# Altium PCB BOARD 2.pcbdoc
Units mil, origin at the board's own origin, x right, y up, seen from the top; angles counter-clockwise.
Board outline 6425 x 5035 mil, 2 copper layers (TopLayer, BottomLayer); 106 components, 189 nets, 1082 pads, 0 vias.
Unrouted connection lines stored in the file: 500.
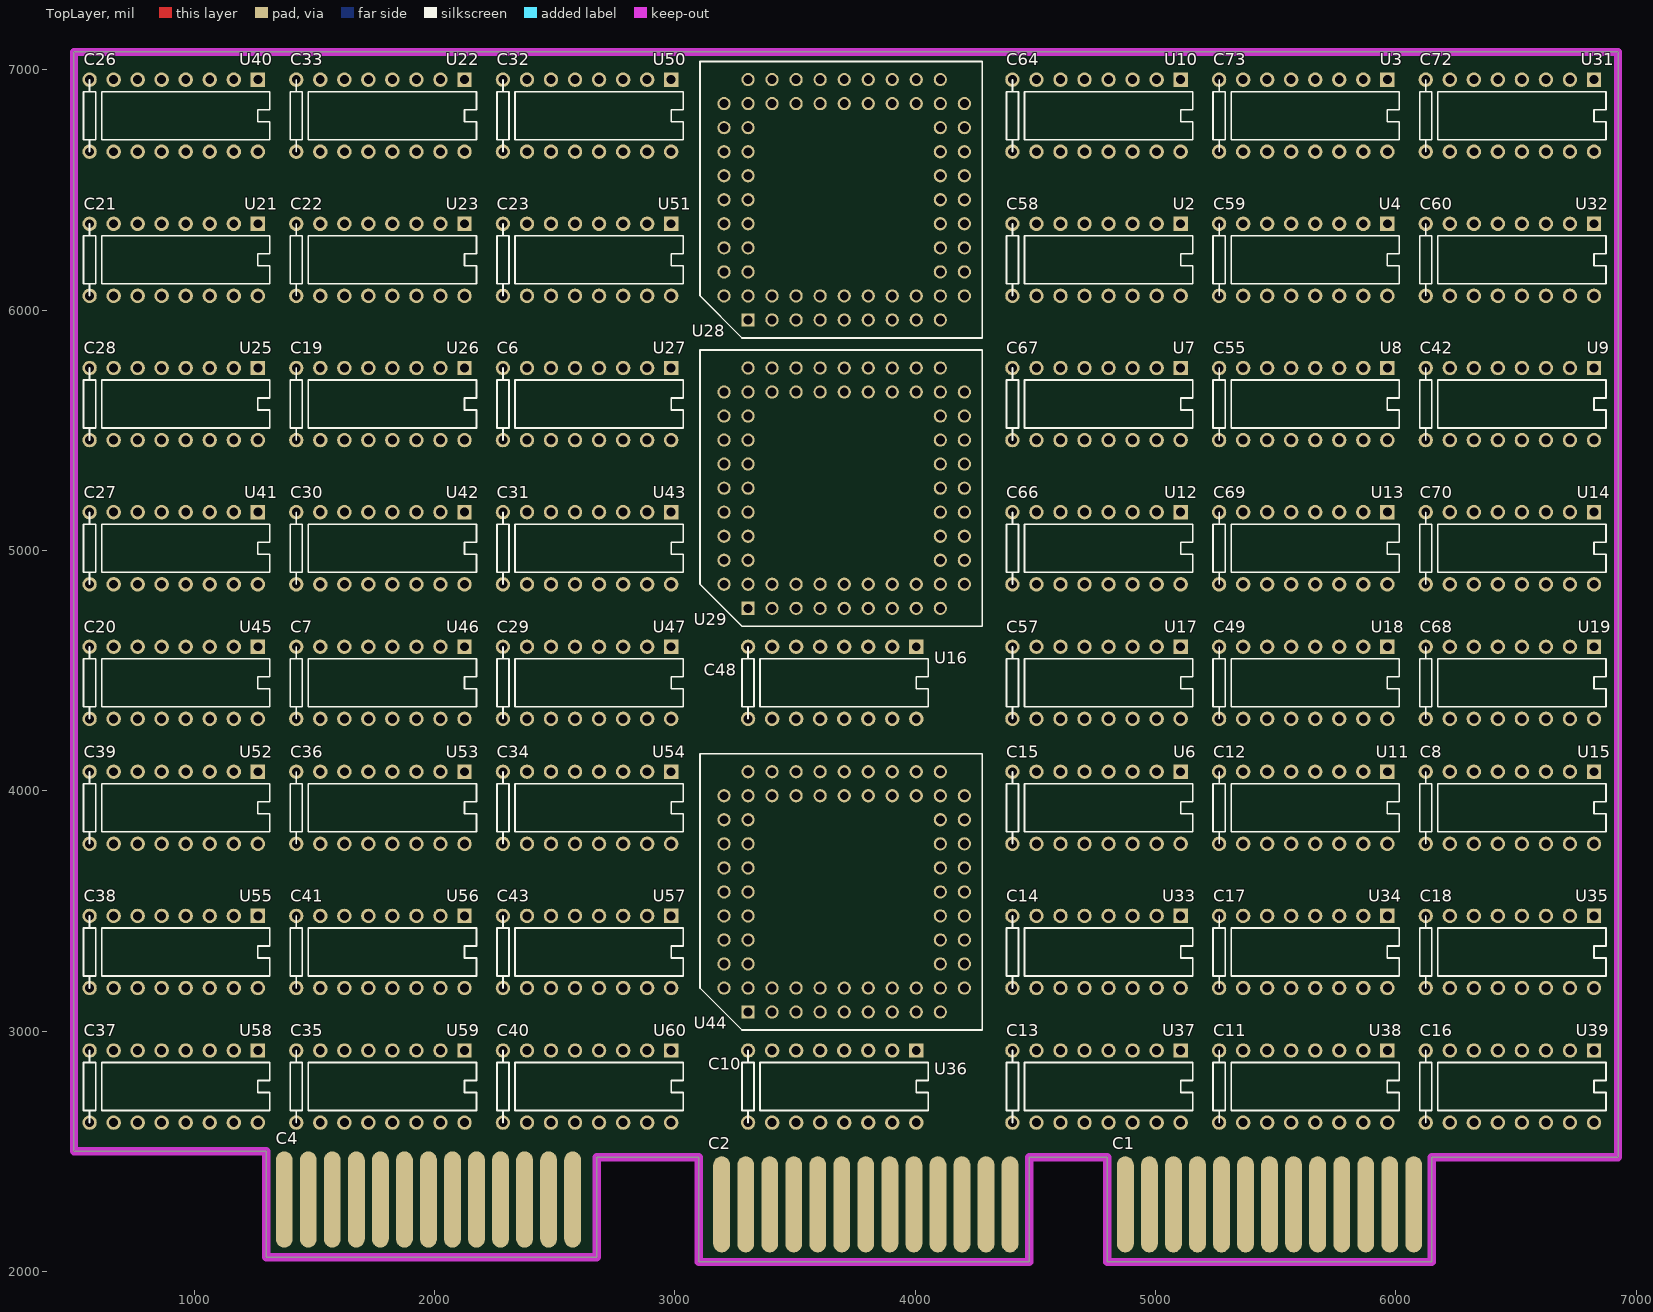
[diagram p0: TopLayer view]
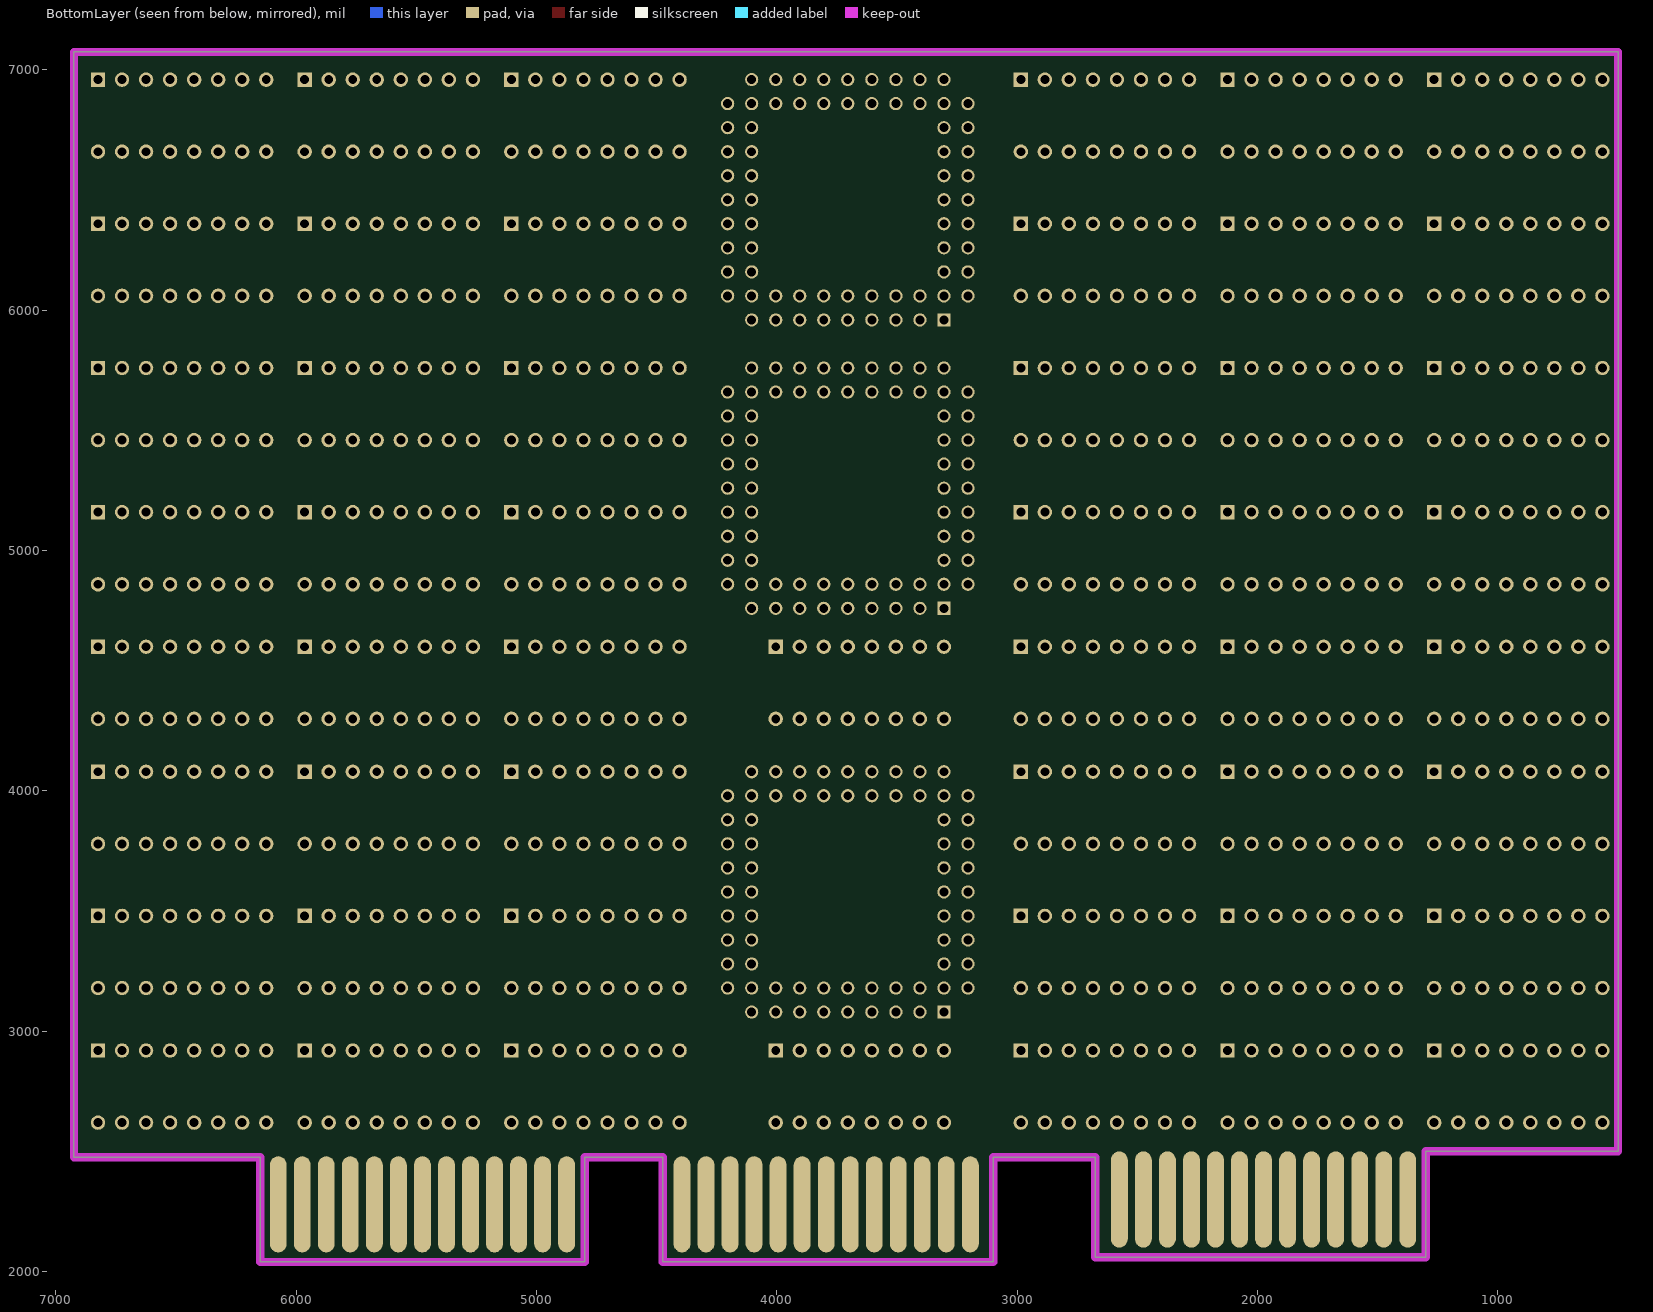
[diagram p1: BottomLayer view, seen from below]

## Layer stack, top to bottom
TopLayer: signal copper 1.4
Dielectric: core 12.6, FR-4, Dk 4.8
BottomLayer: signal copper 1.4

## Board outline
500,2500 500,7075 6925,7075 6925,2475 6150,2475 6150,2040 4800,2040 4800,2475 4475,2475 4475,2040 3100,2040 3100,2475 2675,2475 2675,2060 1300,2060 1300,2500 500,2500

## Design rules (kind name [scope] priority, off if disabled: settings)
Clearance [All] p1: gap=13
FabricationTestPointUsage TestPointUsage [All] p1: valid=0 allowmultiple=FALSE
FabricationTestpoint Testpoint [All] p1: side=3 testpointundercomponent=TRUE minsize=40 maxsize=100 preferedsize=60 minholesize=20 maxholesize=40 preferedholesize=32 testpointgrid=1 allowsidetop=TRUE allowsidebottom=TRUE usegrid=TRUE gridtolerance=0.01
FanoutControl Fanout_BGA [IsBGA] p1: bgadir=Out bgaviamode=Closest fanoutstyle=Auto fanoutdirection=Alternating viagrid=1 // Fanout_BGA (Default Rule)
FanoutControl Fanout_LCC [IsLCC] p2: bgadir=Out bgaviamode=Closest fanoutstyle=Auto fanoutdirection=Alternating viagrid=1 // Fanout_LCC (Default Rule)
FanoutControl Fanout_SOIC [IsSOIC] p3: bgadir=Out bgaviamode=Closest fanoutstyle=Auto fanoutdirection=Alternating viagrid=1 // Fanout_SOIC (Default Rule)
FanoutControl Fanout_Small [(CompPinCount < 5)] p4: bgadir=Out bgaviamode=Closest fanoutstyle=Auto fanoutdirection=OutThenIn viagrid=1 // Fanout_Small (Default Rule)
FanoutControl Fanout_Default [All] p5: bgadir=Out bgaviamode=Closest fanoutstyle=Auto fanoutdirection=Alternating viagrid=1 // Fanout_Default (Default Rule)
PlaneClearance [All] p1: clearance=10
PolygonConnect [All] p1: connectstyle=Relief reliefconductorwidth=10 reliefentries=4 polygonreliefangle="90 Angle"
RoutingPriority RoutingPriority_Power [InNetClass('Power')] p1: routingpriority=50
RoutingPriority [All] p2: routingpriority=0
RoutingVias [All] p1: holewidth=20 width=40 viastyle="Through Hole" minholewidth=20 minwidth=40 maxholewidth=20 maxwidth=40
SilkscreenOverComponentPads [All] p1: minsilkscreentomaskgap=10
SolderMaskExpansion [All] p1: expansion=2
Width Width_Power [InNetClass('Power')] p1: maxlimit=50 minlimit=50 preferedwidth=50
Width Width_All [All] p2: maxlimit=10 minlimit=10 preferedwidth=10
18 further rules are at their usual default settings.

## Classes and differential pairs
net class Power: GND VCC

## Components (designator, comment, footprint, x,y, rotation, side; value= is the part's Value field where it differs from the comment)
C1 "CON\26P\ED" CON\26P\ED 4875,2280 r180 top
C2 "CON\26P\ED" CON\26P\ED 3195,2280 r180 top
C4 "CON\26P\ED" CON\26P\ED 1375,2300 r180 top
C6 "CAP1" CAP1 2285,5460 r0 top
C7 "CAP1" CAP1 1425,4300 r0 top
C8 "CAP1" CAP1 6125,3780 r0 top
C10 "CAP1" CAP1 3305,2620 r0 top
C11 "CAP1" CAP1 5265,2620 r0 top
C12 "CAP1" CAP1 5265,3780 r0 top
C13 "CAP1" CAP1 4405,2620 r0 top
C14 "CAP1" CAP1 4405,3180 r0 top
C15 "CAP1" CAP1 4405,3780 r0 top
C16 "CAP1" CAP1 6125,2620 r0 top
C17 "CAP1" CAP1 5265,3180 r0 top
C18 "CAP1" CAP1 6125,3180 r0 top
C19 "CAP1" CAP1 1425,5460 r0 top
C20 "CAP1" CAP1 565,4300 r0 top
C21 "CAP1" CAP1 565,6060 r0 top
C22 "CAP1" CAP1 1425,6060 r0 top
C23 "CAP1" CAP1 2285,6060 r0 top
C26 "CAP1" CAP1 565,6660 r0 top
C27 "CAP1" CAP1 565,4860 r0 top
C28 "CAP1" CAP1 565,5460 r0 top
C29 "CAP1" CAP1 2285,4300 r0 top
C30 "CAP1" CAP1 1425,4860 r0 top
C31 "CAP1" CAP1 2285,4860 r0 top
C32 "CAP1" CAP1 2285,6660 r0 top
C33 "CAP1" CAP1 1425,6660 r0 top
C34 "CAP1" CAP1 2285,3780 r0 top
C35 "CAP1" CAP1 1425,2620 r0 top
C36 "CAP1" CAP1 1425,3780 r0 top
C37 "CAP1" CAP1 565,2620 r0 top
C38 "CAP1" CAP1 565,3180 r0 top
C39 "CAP1" CAP1 565,3780 r0 top
C40 "CAP1" CAP1 2285,2620 r0 top
C41 "CAP1" CAP1 1425,3180 r0 top
C42 "CAP1" CAP1 6125,5460 r0 top
C43 "CAP1" CAP1 2285,3180 r0 top
C48 "CAP1" CAP1 3305,4300 r0 top
C49 "CAP1" CAP1 5265,4300 r0 top
C55 "CAP1" CAP1 5265,5460 r0 top
C57 "CAP1" CAP1 4405,4300 r0 top
C58 "CAP1" CAP1 4405,6060 r0 top
C59 "CAP1" CAP1 5265,6060 r0 top
C60 "CAP1" CAP1 6125,6060 r0 top
C64 "CAP1" CAP1 4405,6660 r0 top
C66 "CAP1" CAP1 4405,4860 r0 top
C67 "CAP1" CAP1 4405,5460 r0 top
C68 "CAP1" CAP1 6125,4300 r0 top
C69 "CAP1" CAP1 5265,4860 r0 top
C70 "CAP1" CAP1 6125,4860 r0 top
C72 "CAP1" CAP1 6125,6660 r0 top
C73 "CAP1" CAP1 5265,6660 r0 top
U2 "7404" DIP14 5105,6360 r0 top
U3 "7404" DIP14 5965,6960 r0 top
U4 "7404" DIP14 5965,6360 r0 top
U6 "7404" DIP14 5105,4080 r0 top
U7 "7404" DIP14 5105,5760 r0 top
U8 "7404" DIP14 5965,5760 r0 top
U9 "7404" DIP14 6825,5760 r0 top
U10 "7404" DIP14 5105,6960 r0 top
U11 "7404" DIP14 5965,4080 r0 top
U12 "7404" DIP14 5105,5160 r0 top
U13 "7404" DIP14 5965,5160 r0 top
U14 "7404" DIP14 6825,5160 r0 top
U15 "7404" DIP14 6825,4080 r0 top
U16 "7404" DIP14 4005,4600 r0 top
U17 "7404" DIP14 5105,4600 r0 top
U18 "7404" DIP14 5965,4600 r0 top
U19 "7404" DIP14 6825,4600 r0 top
U21 "7404" DIP14 1265,6360 r0 top
U22 "7404" DIP14 2125,6960 r0 top
U23 "7404" DIP14 2125,6360 r0 top
U25 "7404" DIP14 1265,5760 r0 top
U26 "7404" DIP14 2125,5760 r0 top
U27 "7404" DIP14 2985,5760 r0 top
U28 "8397" ? 3305,5960 r0 top
U29 "8397" ? 3305,4760 r0 top
U31 "7404" DIP14 6825,6960 r0 top
U32 "7404" DIP14 6825,6360 r0 top
U33 "7404" DIP14 5105,3480 r0 top
U34 "7404" DIP14 5965,3480 r0 top
U35 "7404" DIP14 6825,3480 r0 top
U36 "7404" DIP14 4005,2920 r0 top
U37 "7404" DIP14 5105,2920 r0 top
U38 "7404" DIP14 5965,2920 r0 top
U39 "7404" DIP14 6825,2920 r0 top
U40 "7404" DIP14 1265,6960 r0 top
U41 "7404" DIP14 1265,5160 r0 top
U42 "7404" DIP14 2125,5160 r0 top
U43 "7404" DIP14 2985,5160 r0 top
U44 "8397" ? 3305,3080 r0 top
U45 "7404" DIP14 1265,4600 r0 top
U46 "7404" DIP14 2125,4600 r0 top
U47 "7404" DIP14 2985,4600 r0 top
U50 "7404" DIP14 2985,6960 r0 top
U51 "7404" DIP14 2985,6360 r0 top
U52 "7404" DIP14 1265,4080 r0 top
U53 "7404" DIP14 2125,4080 r0 top
U54 "7404" DIP14 2985,4080 r0 top
U55 "7404" DIP14 1265,3480 r0 top
U56 "7404" DIP14 2125,3480 r0 top
U57 "7404" DIP14 2985,3480 r0 top
U58 "7404" DIP14 1265,2920 r0 top
U59 "7404" DIP14 2125,2920 r0 top
U60 "7404" DIP14 2985,2920 r0 top

## Footprints (in the part's own frame and the unit in brackets; to place one, negate y for a bottom-side part, rotate by r counter-clockwise, add the part's x,y. Pads: shape width x height; smd on the part's side, far side on the other; paste and mask are expansions set on the pad)
CAP1 [mil]
  round 60 hole 37: 1(0,0) 2(0,300)
  silkscreen extent -25,0 25,300
CON\26P\ED [mil]
  oval 70x400 smd: 1(0,0) 3(-100,0) 5(-200,0) 7(-300,0) 9(-400,0) 11(-500,0) 13(-600,0) 15(-700,0) 17(-800,0) 19(-900,0) 21(-1000,0) 23(-1100,0) 25(-1200,0)
  oval 70x400 smd far side: 2(0,0) 4(-100,0) 6(-200,0) 8(-300,0) 10(-400,0) 12(-500,0) 14(-600,0) 16(-700,0) 18(-800,0) 20(-900,0) 22(-1000,0) 24(-1100,0) 26(-1200,0)
DIP14 [mil]
  rect 60x60 hole 37: 1(0,0)
  round 60 hole 37: 2(-100,0) 3(-200,0) 4(-300,0) 5(-400,0) 6(-500,0) 7(-600,0) 8(-600,-300) 9(-500,-300) 10(-400,-300) 11(-300,-300) 12(-200,-300) 13(-100,-300) 14(0,-300)
  silkscreen extent -650,-250 50,-50
? [mil]
  rect 55x55 hole 37: 1(0,0)
  round 55 hole 37: 2(0,100) 3(100,0) 4(100,100) 5(200,0) 6(200,100) 7(300,0) 8(300,100) 9(400,0) 10(400,100) 11(500,0) 12(500,100) 13(600,0) 14(600,100) 15(700,0) 16(700,100) 17(800,0) 18(900,100) 19(800,100) 20(900,200) 21(800,200) 22(900,300) 23(800,300) 24(900,400) 25(800,400) 26(900,500) 27(800,500) 28(900,600) 29(800,600) 30(900,700) 31(800,700) 32(900,800) 33(800,800) 34(900,900) 35(800,1000) 36(800,900) 37(700,1000) 38(700,900) 39(600,1000) 40(600,900) 41(500,1000) 42(500,900) 43(400,1000) 44(400,900) 45(300,1000) 46(300,900) 47(200,1000) 48(200,900) 49(100,1000) 50(100,900) 51(0,1000) 52(-100,900) 53(0,900) 54(-100,800) 55(0,800) 56(-100,700) 57(0,700) 58(-100,600) 59(0,600) 60(-100,500) 61(0,500) 62(-100,400) 63(0,400) 64(-100,300) 65(0,300) 66(-100,200) 67(0,200) 68(-100,100)
  silkscreen extent -200,-75 975,1075

## Nets (pads, with @x,y where several pads share a name; then routed paths per layer and width w, separated by ;. In a path a pad name is that pad's centre, name@x,y a point inside that pad or via, vN(x,y) a via of type N, cw(c..) or ccw(c..) an arc to the next point about the centre after c; other vN are vias at no path point)
$$$8: U23.11 U28.52
$$$63: U55.12 U56.6
$$$144: U22.3 U27.3 U44.48
$$$183: U4.4 U8.3
$$$210: U3.5 U28.22
$$$274: U28.30 U28.67
$$$675: C2.15 U32.10
$$$691: U26.8 U28.7 U47.9 U50.1
$$$859: U44.30 U54.11
$$$1023: U28.11 U29.35
$$$1061: U8.2 U32.6
$$$1139: U2.5 U9.5
$$$1166: U52.1 U55.8 U59.6
$$$1338: U28.20 U28.54
$$$1745: U38.10 U44.19 U44.27
$$$1779: U12.2 U14.2
$$$1934: U28.19 U31.9
$$$1952: U53.13 U55.1
$$$2193: U28.9 U29.43
$$$2370: U52.2 U58.1
$$$2381: U3.9 U28.65
$$$2413: U28.16 U28.59
$$$2423: U29.41 U31.13
$$$2613: C1.15 U12.13
$$$2920: U11.8 U44.38
$$$3035: U4.9 U4.10 U10.10 U14.13 U17.12
$$$3036: C2.23 U18.6
$$$3260: U21.3 U50.3 U54.1
$$$3322: U28.6 U28.39 U50.9
$$$3431: C2.19 U28.63 U29.12
$$$3444: U44.49 U47.3 U51.2
$$$3502: U18.5 U44.37
$$$3567: U52.6 U55.6
$$$3685: U17.9 U29.20 U37.3
$$$3867: U29.32 U32.3
$$$3914: C2.13 U28.26
$$$3928: U28.29 U28.58 U50.6
$$$3971: U28.42 U51.6
$$$4009: U16.2 U29.13
$$$4093: U3.6 U28.61
$$$4176: U6.4 U15.4 U15.12 U19.2
$$$4277: U12.9 U13.12 U14.4
$$$4295: U6.3 U16.3 U29.5
$$$4393: U28.10 U31.10 U51.9
$$$4428: U28.27 U29.4
$$$4500: U7.9 U14.10 U29.57
$$$4620: U6.6 U44.55 U60.12
$$$4672: C1.1 U19.4
$$$4682: U29.37 U51.10
$$$4769: C4.9 U53.2
$$$4820: U8.1 U14.1
$$$4897: U4.2 U10.11 U14.3 U29.38
$$$4960: U13.4 U19.1
$$$4961: U29.1 U29.39
$$$5040: U15.6 U29.55
$$$5164: U32.9 U44.3
$$$5310: U12.6 U29.33 U29.59
$$$5404: U9.4 U19.3 U32.2
$$$5494: U15.2 U37.2
$$$5496: C1.2 U14.6
$$$5591: U12.3 U18.2 U28.25
$$$5741: U7.1 U29.67
$$$5835: U37.11 U44.11 U57.3
$$$5943: C2.17 U9.9 U10.13 U19.5
$$$5975: U29.16 U29.45
$$$6004: U27.1 U29.6 U51.5
$$$6007: U2.12 U3.13 U13.6 U32.11
$$$6327: U29.22 U29.61
$$$6506: U23.12 U29.50 U46.5
$$$6549: C4.3 U46.8 U54.10
$$$6602: U16.4 U29.9 U29.58
$$$6889: U17.3 U39.4
$$$6926: U43.3 U44.40
$$$6991: U17.6 U29.63
$$$7007: U16.10 U19.12 U43.11 U47.12
$$$7022: U7.10 U14.5 U28.33 U57.11
$$$7226: U33.5 U44.46
$$$7323: C2.9 U13.5
$$$7355: U17.2 U44.44
$$$7715: U10.1 U60.3
$$$7778: U52.3 U52.8 U55.11 U58.8
$$$7877: U17.1 U29.7
$$$7942: U2.3 U4.5 U32.4
$$$8047: U2.4 U4.1
$$$8066: U8.4 U19.11
$$$8332: U29.24 U44.53
$$$8531: U28.18 U29.2
$$$8623: U2.10 U28.46
$$$8661: U3.11 U31.1
$$$8669: C4.15 U54.6 U59.12
$$$8706: U52.11 U53.10 U56.2
$$$8739: U7.13 U10.9 U16.12
$$$8914: U6.8 U29.10
$$$9132: U29.65 U36.8 U44.2 U44.64
$$$9320: U9.1 U13.1 U32.1
$$$9321: U45.10 U55.13 U56.10
$$$9542: U11.3 U19.6 U37.10
$$$9687: U21.10 U28.62 U29.46 U50.12
$$$9865: U18.8 U44.50
$$$9883: U28.12 U28.50
$$$AADHE: U46.1 U54.2 U58.2
$$$AGECH: U33.2 U35.2
$$$AHHHI: U23.2 U40.11 U51.8
$$$AHJFD: U21.12 U22.13 U28.8 U42.6
$$$AIHDE: U29.49 U41.3 U46.2
$$$AJGAA: U11.1 U35.1
$$$AJIBG: U33.10 U36.1
$$$BCBFJ: U26.9 U41.9 U42.12 U43.4
$$$BCJFD: U53.9 U55.9 U56.12 U57.4
$$$BDDHF: U34.10 U36.10 U39.12
$$$BDEIJ: U25.10 U43.5
$$$BDHEB: U55.2 U57.2
$$$BEBDJ: U23.13 U26.6 U42.11 U45.13
$$$BGACF: U26.4 U47.11
$$$BGGBC: U34.4 U39.1
$$$BHEJI: U34.13 U44.25
$$$BIABB: U35.13 U37.12
$$$CAHGG: U11.6 U34.11 U37.13
$$$CBCHE: U53.1 U57.1
$$$CGIGD: U23.3 U27.13 U40.6
$$$CIDID: U55.3 U59.2
$$$DAIED: U6.10 U35.5
$$$DCCJI: U25.9 U43.10
$$$DFGAI: U42.4 U47.1
$$$DJABJ: U52.9 U57.10 U59.5
$$$EABFC: U6.12 U34.3 U37.5 U38.13
$$$EAGCC: U6.13 U36.12
$$$EDCCF: U21.6 U25.2
$$$EEFFB: U21.5 U27.5
$$$EJDID: U45.9 U58.3
$$$FBEJC: U53.4 U60.11
$$$FCEDE: U44.1 U44.39
$$$FDEBH: U37.9 U44.20
$$$FEBDG: U36.9 U44.29
$$$FEIEE: U21.1 U26.1
$$$FFCEC: U57.13 U58.12
$$$FGBCC: U37.6 U44.63
$$$FGBCD: U33.6 U44.33
$$$FIBII: U53.6 U56.11 U58.13
$$$FJAFH: U21.4 U23.1
$$$FJIDJ: U36.4 U44.9 U44.58
$$$GAGIB: U52.12 U56.3 U58.5 U59.13
$$$GEDBF: U52.10 U57.5
$$$GEECJ: C4.19 U44.12
$$$GGBFA: U11.5 U35.9
$$$GGEHJ: U21.11 U26.5 U40.5
$$$GHCAI: U56.4 U60.1
$$$HAFJG: U15.9 U39.5
$$$HBAEF: U36.2 U44.13
$$$HBEHJ: U44.16 U44.45
$$$HBFJD: U41.2 U43.2
$$$HBJHI: U6.9 U35.10 U38.5 U44.57
$$$HECHG: C4.7 U39.9
$$$HJJIF: U45.3 U60.4
$$$ICCJI: U47.6 U58.10
$$$IDHGA: U53.5 U57.9
$$$IEHDA: U44.22 U44.61
$$$IFBFJ: U23.9 U40.3 U40.10 U43.13 U45.12
$$$IFGFD: U36.3 U44.5
$$$IHIFF: U11.4 U39.11
$$$JAAAJ: U25.13 U40.9
$$$JADED: U11.9 U33.9 U34.12 U35.4
$$$JBGJA: U22.10 U41.10 U51.4
$$$JGABC: U54.9 U60.5
$$$JHDFD: C4.23 U38.6
$$$JJFCI: U27.9 U40.13
CD: U27.11 U28.56
E: U29.60 U44.60
FR: U16.9 U28.17 U28.66 U29.29 U50.5
FW: U45.4 U47.13
GND: C2.1 C4.1 C6.1 C7.1 C8.1 C10.1 C11.1 C12.1 C13.1 C14.1 C15.1 C16.1 C17.1 C18.1 C19.1 C20.1 C21.1 C22.1 C23.1 C26.1 C27.1 C28.1 C29.1 C30.1 C31.1 C32.1 C33.1 C34.1 C35.1 C36.1 C37.1 C38.1 C39.1 C40.1 C41.1 C42.1 C43.1 C48.1 C49.1 C55.1 C57.1 C58.1 C59.1 C60.1 C64.1 C66.1 C67.1 C68.1 C69.1 C70.1 C72.1 C73.1 U2.14 U3.14 U4.14 U6.14 U7.14 U8.14 U9.14 U10.14 U11.14 U12.14 U13.14 U14.14 U15.14 U16.14 U17.14 U18.14 U19.14 U21.14 U22.14 U23.14 U25.14 U26.14 U27.14 U28.51 U29.51 U32.14 U33.14 U34.14 U35.14 U36.14 U37.14 U38.14 U39.14 U40.14 U41.14 U42.14 U43.14 U44.51 U45.14 U46.14 U47.14 U50.14 U51.14 U52.14 U53.14 U54.14 U55.14 U56.14 U57.14 U58.14 U59.14 U60.14
GT: U22.12 U40.2
GY: U21.9 U23.5 U27.6 U46.10 U47.2 U52.4 U54.4 U54.12
HY: U18.13 U33.4
IU: U6.5 U15.13 U44.67 U60.10
L: U29.52 U44.52
NH: U3.10 U12.10
OI: U2.13 U3.12 U7.12 U13.3 U28.28
P: U2.11 U8.5 U10.5 U14.9 U28.49 U31.12 U51.12
Q: U29.56 U44.56
SE: U22.2 U22.9 U27.4
UH: U13.11 U17.13 U27.12
VCC: C1.25 C6.2 C7.2 C8.2 C10.2 C11.2 C12.2 C13.2 C14.2 C15.2 C16.2 C17.2 C18.2 C19.2 C20.2 C21.2 C22.2 C23.2 C26.2 C27.2 C28.2 C29.2 C30.2 C31.2 C32.2 C33.2 C34.2 C35.2 C36.2 C37.2 C38.2 C39.2 C40.2 C41.2 C42.2 C43.2 C48.2 C49.2 C55.2 C57.2 C58.2 C59.2 C60.2 C64.2 C66.2 C67.2 C68.2 C69.2 C70.2 C72.2 C73.2 U2.7 U3.7 U4.7 U6.7 U7.7 U8.7 U9.7 U10.7 U11.7 U12.7 U13.7 U14.7 U15.7 U16.7 U17.7 U18.7 U19.7 U21.7 U22.7 U23.7 U25.7 U26.7 U27.7 U28.34 U29.34 U33.7 U34.7 U35.7 U36.7 U37.7 U38.7 U39.7 U40.7 U41.7 U42.7 U43.7 U44.34 U45.7 U46.7 U47.7 U50.7 U51.7 U52.7 U53.7 U54.7 U55.7 U56.7 U57.7 U58.7 U59.7 U60.7
VF: U23.4 U25.6 U26.3 U45.11
YG: U2.6 U7.2
YT: U2.1 U4.13 U8.6
YTY: U16.13 U58.4
YU: U21.13 U25.12 U42.3 U46.13 U55.4
Z: U29.62 U44.62
pads on no net: C1.3 C1.4 C1.5 C1.6 C1.7 C1.8 C1.9 C1.10 C1.11 C1.12 C1.13 C1.14 C1.16 C1.17 C1.18 C1.19 C1.20 C1.21 C1.22 C1.23 C1.24 C1.26 C2.2 C2.3 C2.4 C2.5 C2.6 C2.7 C2.8 C2.10 C2.11 C2.12 C2.14 C2.16 C2.18 C2.20 C2.21 C2.22 C2.24 C2.25 C2.26 C4.2 C4.4 C4.5 C4.6 C4.8 C4.10 C4.11 C4.12 C4.13 C4.14 C4.16 C4.17 C4.18 C4.20 C4.21 C4.22 C4.24 C4.25 C4.26 U2.2 U2.8 U2.9 U3.1 U3.2 U3.3 U3.4 U3.8 U4.3 U4.6 U4.8 U4.11 U4.12 U6.1 U6.2 U6.11 U7.3 U7.4 U7.5 U7.6 U7.8 U7.11 U8.8 U8.9 U8.10 U8.11 U8.12 U8.13 U9.2 U9.3 U9.6 U9.8 U9.10 U9.11 U9.12 U9.13 U10.2 U10.3 U10.4 U10.6 U10.8 U10.12 U11.2 U11.10 U11.11 U11.12 U11.13 U12.1 U12.4 U12.5 U12.8 U12.11 U12.12 U13.2 U13.8 U13.9 U13.10 U13.13 U14.8 U14.11 U14.12 U15.1 U15.3 U15.5 U15.8 U15.10 U15.11 U16.1 U16.5 U16.6 U16.8 U16.11 U17.4 U17.5 U17.8 U17.10 U17.11 U18.1 U18.3 U18.4 U18.9 U18.10 U18.11 U18.12 U19.8 U19.9 U19.10 U19.13 U21.2 U21.8 U22.1 U22.4 U22.5 U22.6 U22.8 U22.11 U23.6 U23.8 U23.10 U25.1 U25.3 U25.4 U25.5 U25.8 U25.11 U26.2 U26.10 U26.11 U26.12 U26.13 U27.2 U27.8 U27.10 U28.1 U28.2 U28.3 U28.4 U28.5 U28.13 U28.14 U28.15 U28.21 U28.23 U28.24 U28.31 U28.32 U28.35 U28.36 U28.37 U28.38 U28.40 U28.41 U28.43 U28.44 U28.45 U28.47 U28.48 U28.53 U28.55 U28.57 U28.60 U28.64 U28.68 U29.3 U29.8 U29.11 U29.14 U29.15 U29.17 U29.18 U29.19 U29.21 U29.23 U29.25 U29.26 U29.27 U29.28 U29.30 U29.31 U29.36 U29.40 U29.42 U29.44 U29.47 U29.48 U29.53 U29.54 U29.64 U29.66 U29.68 U31.2 U31.3 U31.4 U31.5 U31.6 U31.7 U31.8 U31.11 U31.14 U32.5 U32.7 U32.8 U32.12 U32.13 U33.1 U33.3 U33.8 U33.11 U33.12 U33.13 U34.1 U34.2 U34.5 U34.6 U34.8 U34.9 U35.3 U35.6 U35.8 U35.11 U35.12 U36.5 U36.6 U36.11 U36.13 U37.1 U37.4 U37.8 U38.1 U38.2 U38.3 U38.4 U38.8 U38.9 U38.11 U38.12 U39.2 U39.3 U39.6 U39.8 U39.10 U39.13 U40.1 U40.4 U40.8 U40.12 U41.1 U41.4 U41.5 U41.6 U41.8 U41.11 U41.12 U41.13 U42.1 U42.2 U42.5 U42.8 U42.9 U42.10 U42.13 U43.1 U43.6 U43.8 U43.9 U43.12 U44.4 U44.6 U44.7 U44.8 U44.10 U44.14 U44.15 U44.17 U44.18 U44.21 U44.23 U44.24 U44.26 U44.28 U44.31 U44.32 U44.35 U44.36 U44.41 U44.42 U44.43 U44.47 U44.54 U44.59 U44.65 U44.66 U44.68 U45.1 U45.2 U45.5 U45.6 U45.8 U46.3 U46.4 U46.6 U46.9 U46.11 U46.12 U47.4 U47.5 U47.8 U47.10 U50.2 U50.4 U50.8 U50.10 U50.11 U50.13 U51.1 U51.3 U51.11 U51.13 U52.5 U52.13 U53.3 U53.8 U53.11 U53.12 U54.3 U54.5 U54.8 U54.13 U55.5 U55.10 U56.1 U56.5 U56.8 U56.9 U56.13 U57.6 U57.8 U57.12 U58.6 U58.9 U58.11 U59.1 U59.3 U59.4 U59.8 U59.9 U59.10 U59.11 U60.2 U60.6 U60.8 U60.9 U60.13

## Keep-outs
KeepOutLayer:
  the board outline again, w35